# EAGLE board deflectorshield_tng (EAGLE 7.6.0)

Size 100 x 80 mm. Coordinates in mm from the lower left corner, seen from the top.
Outline: 0,0 100,0 100,80 0,80 0,0
Copper layers (1*16): Top 0.035mm / dielectric 1.5mm / Bottom 0.035mm
Design rules "default": minimum track width 10mil, minimum drill 24mil, track to track 8mil, track to pad 8mil, pad to pad 8mil, via to via 8mil, smd to smd 8mil, copper to edge 40mil, drill to drill 8mil, minimum pad ring 10mil, minimum via ring 8mil, stop-mask expansion 4mil, vias tented up to drill 0mil, thermal gap 10mil
Net classes: 0 default: width 0.508 mm

## Footprints (pad centres in the part's own frame; a part is rotated, then mirrored left to right if it is on the bottom)
SCREWTERMINAL-3.5MM-2 = drill 1.2 pad 2.032 square: 1 0,0 | drill 1.2 pad 2.032: 2 3.5,0
C0805 = smd 1.3 x 1.5: 1 -0.95,0; 2 0.95,0
C0603 = smd 1.1 x 1: 1 -0.85,0; 2 0.85,0
SMA-DIODE = smd 1.27 x 1.47: A -2.15,0; C 2.15,0
SOT223 = smd 1.499 x 2.007: 1 -2.261,-3.15; 2 0.025,-3.15; 3 2.311,-3.15 | smd 3.81 x 2.007: 4 0,3.15
SOT223' = smd 1.219 x 2.235: 1 -2.311,-3.099; 2 0,-3.099; 3 2.311,-3.099 | smd 3.6 x 2.2: 4 0,3.099
R1210 = smd 1.6 x 2.7: 1 -1.4,0; 2 1.4,0
R0603 = smd 1 x 1.1: 1 -0.85,0; 2 0.85,0
SOIC8 = smd 0.5 x 2.2: 1 -1.905,-3.154; 2 -0.645,-3.154; 3 0.625,-3.154; 4 1.895,-3.154; 5 1.905,3.154; 6 0.635,3.154; 7 -0.635,3.154; 8 -1.905,3.154
W237-102 = drill 1.245 long: 1 -2.5,-1.27; 2 2.5,-1.27

## Placement (x,y rotation side)
ACCEL  [SCREWTERMINAL-3.5MM-2]  -66.04,87.63 0 top  (outside the outline)
C2  [C0805]  -59.69,95.25 0 top  (outside the outline)
C3  [C0805]  -64.77,95.25 0 top  (outside the outline)
C4  0.1uf  [C0603]  -45.72,96.52 0 top  (outside the outline)
C8  10uf  [C0805]  -39.37,96.52 0 top  (outside the outline)
D1  [SMA-DIODE]  -69.85,95.25 0 top  (outside the outline)
DEFLECT_X  [SCREWTERMINAL-3.5MM-2]  -74.93,87.63 0 top  (outside the outline)
DEFLECT_Y  [SCREWTERMINAL-3.5MM-2]  -19.05,97.79 0 top  (outside the outline)
FOCUS  [SCREWTERMINAL-3.5MM-2]  -27.94,97.79 0 top  (outside the outline)
IC1  REG1117  [SOT223]  -19.05,6.35 0 top  (outside the outline)
Q1  N-HEXFET_SOT323-IRLL2705  [SOT223']  -66.04,5.08 0 top  (outside the outline)
Q2  [SOT223']  -73.66,-5.08 0 top  (outside the outline)
Q3  [SOT223']  -73.66,-15.24 0 top  (outside the outline)
Q4  [SOT223']  -73.66,-25.4 0 top  (outside the outline)
Q5  [SOT223']  -73.66,-35.56 0 top  (outside the outline)
Q6  N-HEXFET_SOT323-IRLL2705  [SOT223']  -36.83,38.1 0 top  (outside the outline)
Q7  N-HEXFET_SOT323-IRLL2705  [SOT223']  -64.77,38.1 0 top  (outside the outline)
Q8  N-HEXFET_SOT323-IRLL2705  [SOT223']  -36.83,48.26 0 top  (outside the outline)
Q9  [SOT223']  -64.77,48.26 0 top  (outside the outline)
Q10  [SOT223']  -36.83,58.42 0 top  (outside the outline)
Q11  [SOT223']  -73.66,-45.72 0 top  (outside the outline)
Q12  [SOT223']  -73.66,-55.88 0 top  (outside the outline)
R1  2.2r  [R1210]  -43.18,87.63 0 top  (outside the outline)
R5  2.2r  [R1210]  -49.53,87.63 0 top  (outside the outline)
R6  2.2r  [R1210]  -55.88,87.63 0 top  (outside the outline)
R13  1k  [R0603]  -50.8,96.52 0 top  (outside the outline)
R14  1k  [R0603]  -55.88,96.52 0 top  (outside the outline)
U$2  LM5109  [SOIC8]  -38.1,5.08 0 top  (outside the outline)
X1  [W237-102]  -27.94,6.35 0 top  (outside the outline)

## Library data of the parts
ACCEL DEFLECT_X DEFLECT_Y FOCUS = SparkFun-Connectors; PROD_ID: CONN-08399
C2 C3 = resistor
C4 C8 R1 R5 R6 R13 R14 = rcl
D1 = SparkFun-DiscreteSemi
IC1 = burr-brown; MPN: REG1117; OC_FARNELL: 1097566; OC_NEWARK: 14P6981
Q1-Q12 = transistor-power
U$2 = TheLibrary
X1 = con-wago-500; MPN: 237-102; OC_FARNELL: unknown; OC_NEWARK: 70K9898

## Nets
12V: C8.1 R1.1 U$2.1
A_HI: R13.2 U$2.2
A_LO: R14.2 U$2.3
GND: C8.2 IC1.1 Q6.3 R13.1 R14.1 U$2.4
N$1: DEFLECT_X.2 Q2.3 Q3.4
N$3: Q4.3 Q5.4
N$4: Q11.3 Q12.4
N$5: Q7.3 Q8.4
N$6: D1.A R1.2
N$7: C4.1 D1.C U$2.8
N$8: C4.2 U$2.6
N$9: DEFLECT_X.1 Q9.3 Q10.4
N$15: R5.1 U$2.7
N$16: R6.1 U$2.5

## Tracks (layer width: path | path; a pad name or v marks a point on that pad's centre or on a via)
12V  (2 unrouted)
A_HI  (1 unrouted)
A_LO  (1 unrouted)
GND  (5 unrouted)
N$1  (2 unrouted)
N$3  (1 unrouted)
N$4  (1 unrouted)
N$5  (1 unrouted)
N$6  (1 unrouted)
N$7  (2 unrouted)
N$8  (1 unrouted)
N$9  (2 unrouted)
N$15  (1 unrouted)
N$16  (1 unrouted)